# EAGLE board OSSILEDControllerNew (EAGLE 6.5.0)
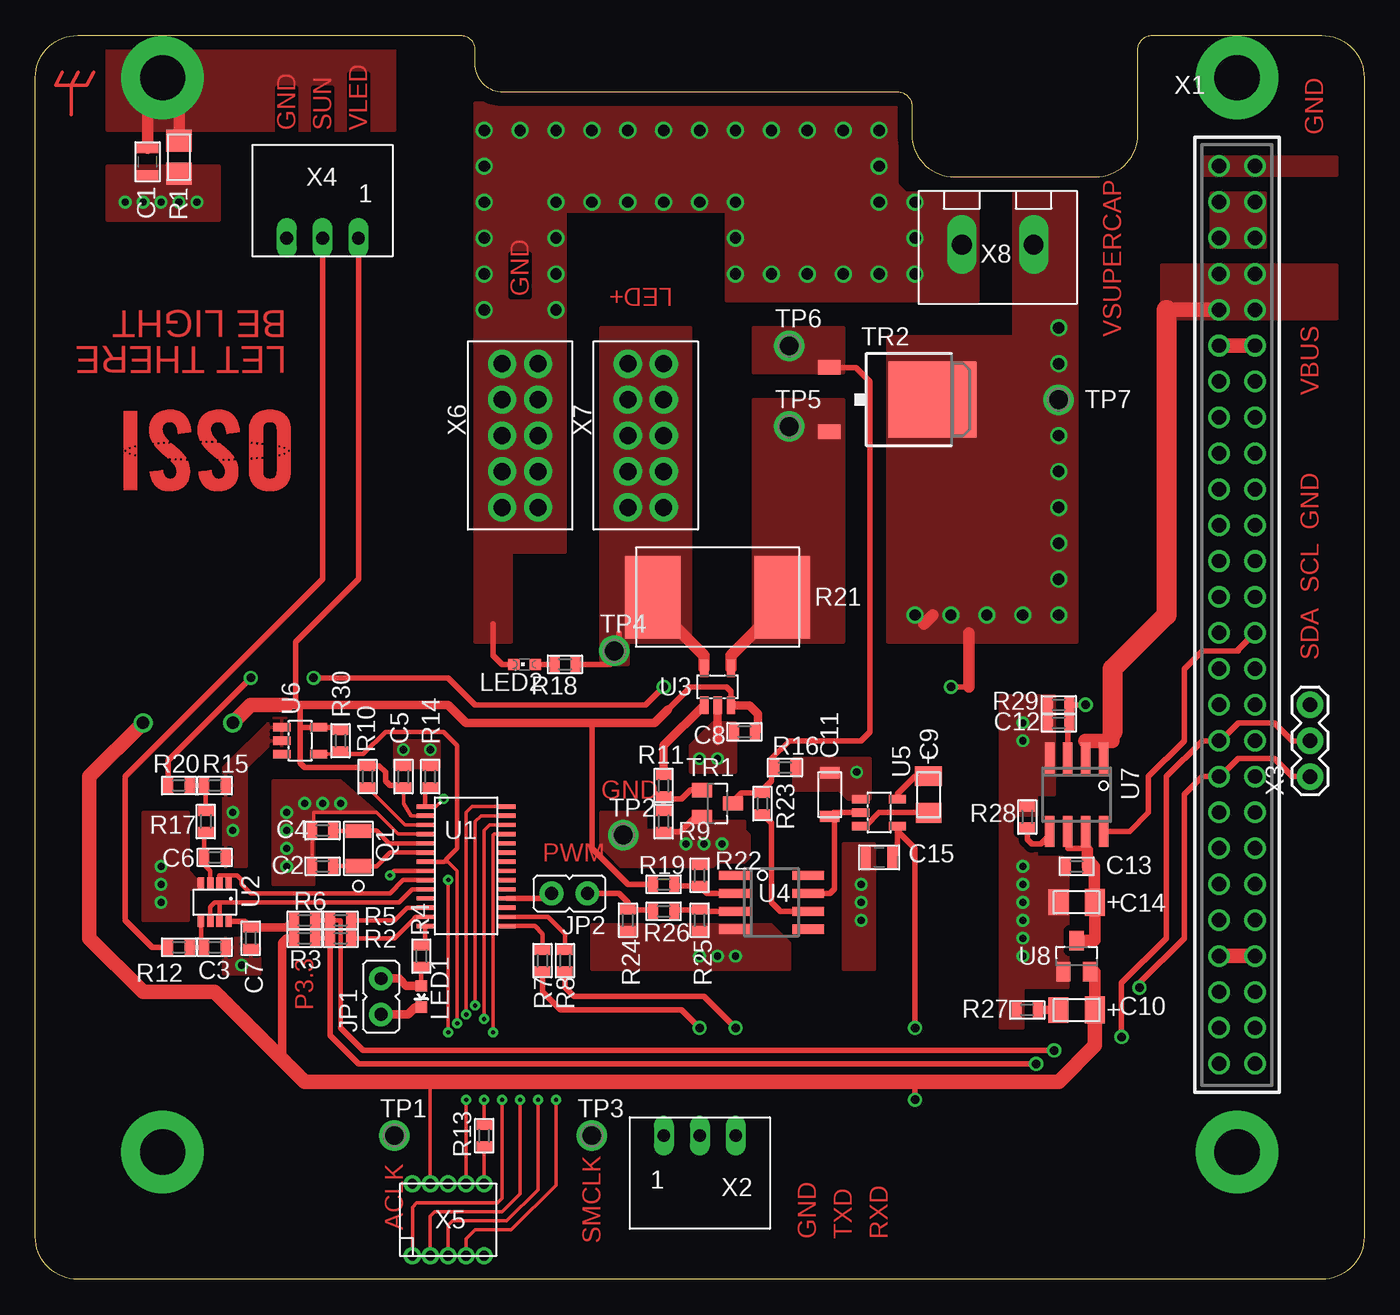
[diagram p0: board, top side]
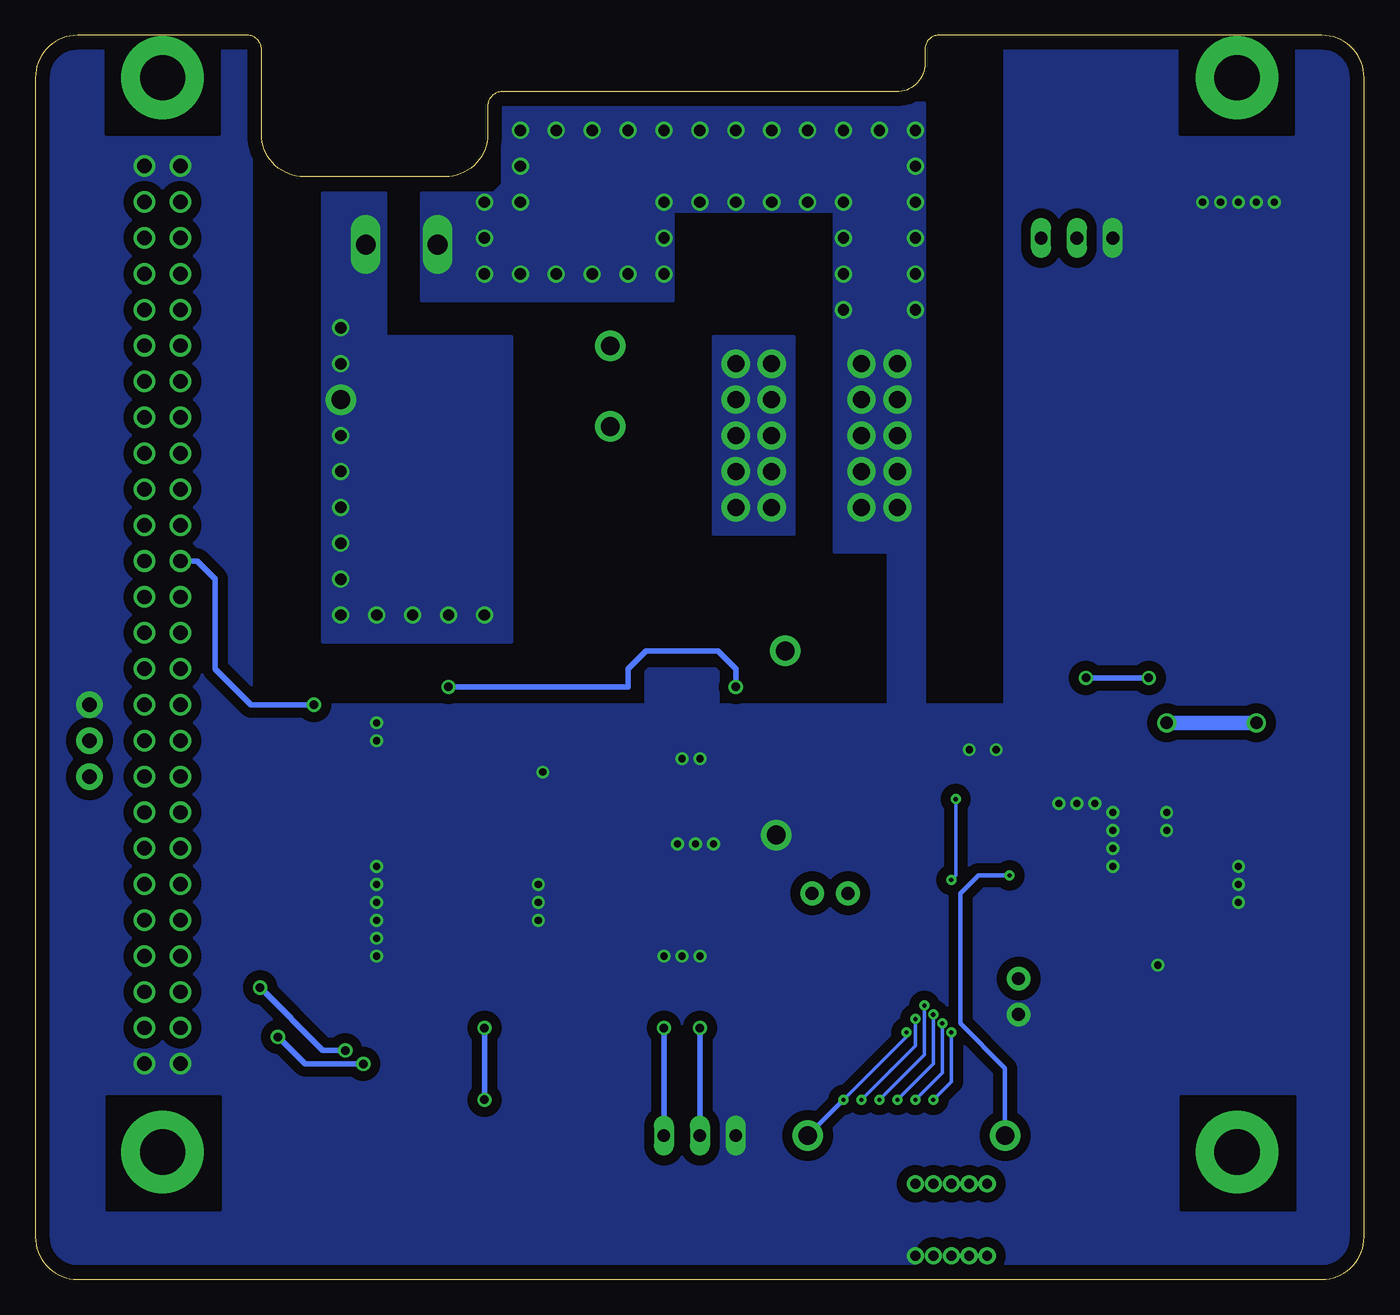
[diagram p1: board, bottom side, seen from below]

Size 94 x 88 mm. Coordinates in mm from the lower left corner, seen from the top.
Outline: 91,0 3,0 arc-90 0,3 0,85 arc-90 3,88 30.08,88 arc-90 31.08,87 31.08,86 arc90 33.08,84 44,84 44.08,84 61,84 arc-90 62,83 62,81 arc90 65,78 75,78 arc90 78,81 78,87 arc-90 79,88 91,88 arc-90 94,85 94,3 arc-90 91,0
Copper layers (1*16): Top 0.035mm / dielectric 1.5mm / Bottom 0.035mm
Design rules "default": minimum track width 10mil, minimum drill 24mil, track to track 8mil, track to pad 8mil, pad to pad 8mil, via to via 8mil, smd to smd 8mil, copper to edge 40mil, drill to drill 8mil, minimum pad ring 10mil, minimum via ring 8mil, stop-mask expansion 4mil, vias tented up to drill 0mil, thermal gap 10mil

## Footprints (pad centres in the part's own frame; a part is rotated, then mirrored left to right if it is on the bottom)
C0805(2012) = smd 0.7 x 1.5: 1 -0.95,0; 2 0.95,0
C0603(1608) = smd 0.7 x 1.1: 1 -0.75,0; 2 0.75,0
C1206(3216)-A = smd 1.4 x 1.9: 1 -1.3,0 | smd 1.4 x 1.8: 2 1.3,0
C1206-GCM31 = smd 0.8 x 1.4: P$1 -1.55,0; P$2 1.55,0
3.2-PAD-ROUND = drill 3.2 pad 5.842: B3,2 0,0
JP1 = drill 0.914 pad 1.676: 1 0,-1.27; 2 0,1.27
LED-0603 = smd 0.8 x 0.8: A 0,-0.75; C 0,0.75
CHIPLED_0603 = smd 0.8 x 0.8: A 0,-0.75; C 0,0.75
NX-3215 = smd 1 x 1.8: 1 -1.25,0; 2 1.25,0
WSL1206 = smd 1.57 x 1.78: P$1 -1.165,0; P$2 1.165,0
R0603(1608) = smd 0.7 x 1.1: 1 -0.75,0; 2 0.75,0
R4527(12070) = smd 3.94 x 5.84: P$1 -4.575,0; P$2 4.575,0
TP-13 = drill 1.321 pad 2.159: TP 0,0
SOT23 = smd 1 x 1.4: 1 -0.95,-1.1; 2 0.95,-1.1; 3 0,1.1
TO252 = smd 5.4 x 6.2: D 0,2.5 | smd 1 x 1.6: G -2.28,-4.8; S 2.28,-4.8
PW28 = smd 0.3 x 1.2: 1 -4.229,-2.908; 2 -3.579,-2.908; 3 -2.929,-2.908; 4 -2.279,-2.908; 5 -1.629,-2.908; 6 -0.979,-2.908; 7 -0.329,-2.908; 8 0.321,-2.908; 9 0.971,-2.908; 10 1.621,-2.908; 11 2.271,-2.908; 12 2.921,-2.908; 13 3.571,-2.908; 14 4.221,-2.908; 15 4.221,2.892; 16 3.571,2.892; 17 2.921,2.892; 18 2.271,2.892; 19 1.621,2.892; 20 0.971,2.892; 21 0.321,2.892; 22 -0.329,2.892; 23 -0.979,2.892; 24 -1.629,2.892; 25 -2.279,2.892; 26 -2.929,2.892; 27 -3.579,2.892; 28 -4.229,2.892
SOT23-8DCN = smd 0.45 x 0.8: 1 -0.975,-1.35; 2 -0.325,-1.35; 3 0.325,-1.35; 4 0.975,-1.35; 5 0.975,1.35; 6 0.325,1.35; 7 -0.325,1.35; 8 -0.975,1.35
SOT23-5DBV = smd 0.6 x 1.22: 1 -0.95,-1.3; 2 0,-1.3; 3 0.95,-1.3; 4 0.95,1.3; 5 -0.95,1.3
SO8 = smd 0.65 x 2.2: 1 -1.905,-2.6; 2 -0.635,-2.6; 3 0.635,-2.6; 4 1.905,-2.6; 5 1.905,2.6; 6 0.635,2.6; 7 -0.635,2.6; 8 -1.905,2.6
ESQ-126-XX-X-D = drill 1.016 pad 1.524: 1 -1.27,31.75; 2 1.27,31.75; 3 -1.27,29.21; 4 1.27,29.21; 5 -1.27,26.67; 6 1.27,26.67; 7 -1.27,24.13; 8 1.27,24.13; 9 -1.27,21.59; 10 1.27,21.59; 11 -1.27,19.05; 12 1.27,19.05; 13 -1.27,16.51; 14 1.27,16.51; 15 -1.27,13.97; 16 1.27,13.97; 17 -1.27,11.43; 18 1.27,11.43; 19 -1.27,8.89; 20 1.27,8.89; 21 -1.27,6.35; 22 1.27,6.35; 23 -1.27,3.81; 24 1.27,3.81; 25 -1.27,1.27; 26 1.27,1.27; 27 -1.27,-1.27; 28 1.27,-1.27; 29 -1.27,-3.81; 30 1.27,-3.81; 31 -1.27,-6.35; 32 1.27,-6.35; 33 -1.27,-8.89; 34 1.27,-8.89; 35 -1.27,-11.43; 36 1.27,-11.43; 37 -1.27,-13.97; 38 1.27,-13.97; 39 -1.27,-16.51; 40 1.27,-16.51; 41 -1.27,-19.05; 42 1.27,-19.05; 43 -1.27,-21.59; 44 1.27,-21.59; 45 -1.27,-24.13; 46 1.27,-24.13; 47 -1.27,-26.67; 48 1.27,-26.67; 49 -1.27,-29.21; 50 1.27,-29.21; 51 -1.27,-31.75; 52 1.27,-31.75
5268-03 = drill 0.9 long: 1 2.54,0; 2 0,0; 3 -2.54,0
1X03 = drill 1.016 pad 1.88: 1 0,0; 2 2.54,0; 3 5.08,0
M50-3200545 = drill 0.7 pad 1: 1 -2.54,-2.54; 2 -2.54,2.54; 3 -1.27,-2.54; 4 -1.27,2.54; 5 0,-2.54; 6 0,2.54; 7 1.27,-2.54; 8 1.27,2.54; 9 2.54,-2.54; 10 2.54,2.54
ICCON6643220-1 = drill 1.2 pad 2: 1 -1.27,5.08; 2 -1.27,2.54; 3 -1.27,0; 4 -1.27,-2.54; 5 -1.27,-5.08; 6 1.27,-5.08; 7 1.27,-2.54; 8 1.27,0; 9 1.27,2.54; 10 1.27,5.08
WEIDMULLER1760490000 = drill 1.4 long: 1 2.54,0; 2 -2.54,0

## Placement (x,y rotation side)
C1  DNP  [C0805(2012)]  7.94,79.06 270 top
C2  12.5pF  [C0603(1608)]  20.32,29.21 180 top
C3  100nF  [C0603(1608)]  12.7,23.5 0 top
C4  12.5pF  [C0603(1608)]  20.32,31.75 180 top
C5  100nF  [C0603(1608)]  26.04,35.56 90 top
C6  100nF  [C0603(1608)]  12.7,29.84 0 top
C7  100nF  [C0603(1608)]  15.24,24.13 270 top
C8  100nF  [C0603(1608)]  50.16,38.73 180 top
C9  10uF, LDO Tantal 16V  [C1206(3216)-A]  63.18,34.29 270 top
C10  10uF, LDO Tantal 16V  [C1206(3216)-A]  73.66,19.05 180 top
C11  4.7uF, 1206 Cap  [C1206-GCM31]  56.2,34.29 90 top
C12  1uF  [C0603(1608)]  72.39,40.64 180 top
C13  100nF  [C0603(1608)]  73.66,29.21 180 top
C14  10uF, LDO Tantal 16V  [C1206(3216)-A]  73.66,26.67 180 top
C15  1uF 0805  [C0805(2012)]  59.69,29.84 180 top
H1  MOUNT-PAD-ROUND3.2  [3.2-PAD-ROUND]  9,9 0 top
H2  MOUNT-PAD-ROUND3.2  [3.2-PAD-ROUND]  85,9 0 top
H3  MOUNT-PAD-ROUND3.2  [3.2-PAD-ROUND]  85,85 0 top
H4  MOUNT-PAD-ROUND3.2  [3.2-PAD-ROUND]  9,85 0 top
JP1  [JP1]  24.45,20 0 top
JP2  [JP1]  37.78,27.3 90 top
LED1  [LED-0603]  27.3,20 180 top
LED2  [CHIPLED_0603]  34.61,43.5 90 top
Q1  NX-3215  [NX-3215]  22.86,30.48 90 top
R1  DNP  [WSL1206]  10.16,79.38 90 top
R2  250  [R0603(1608)]  21.59,24.13 0 top
R3  10k  [R0603(1608)]  19.05,24.13 180 top
R4  1k  [R0603(1608)]  27.3,22.86 270 top
R5  250  [R0603(1608)]  21.59,25.4 0 top
R6  10k  [R0603(1608)]  19.05,25.4 180 top
R7  4.7k  [R0603(1608)]  35.88,22.54 90 top
R8  4.7k  [R0603(1608)]  37.47,22.54 90 top
R9  3k  [R0603(1608)]  44.45,32.38 270 top
R10  TBD  [R0603(1608)]  23.5,35.56 270 top
R11  5.1k  [R0603(1608)]  44.45,34.92 270 top
R12  1k  [R0603(1608)]  10.16,23.5 180 top
R13  4.7k  [R0603(1608)]  31.75,10.16 90 top
R14  47k  [R0603(1608)]  27.94,35.56 270 top
R15  100k  [R0603(1608)]  12.7,34.92 0 top
R16  DNP  [R0603(1608)]  53.02,36.2 0 top
R17  1k  [R0603(1608)]  12.06,32.38 90 top
R18  1.5k  [R0603(1608)]  37.47,43.5 180 top
R19  2.4k  [R0603(1608)]  44.45,27.94 180 top
R20  100k  [R0603(1608)]  10.16,34.92 0 top
R21  0.005, 2W RSENSE  [R4527(12070)]  48.26,48.26 180 top
R22  1.1k  [R0603(1608)]  46.99,28.57 90 top
R23  1k  [R0603(1608)]  51.44,33.66 90 top
R24  100k  [R0603(1608)]  41.91,25.4 270 top
R25  DNP  [R0603(1608)]  46.99,25.4 270 top
R26  1.5k  [R0603(1608)]  44.45,26.04 180 top
R27  0  [R0603(1608)]  70.17,19.05 180 top
R28  TBD  [R0603(1608)]  70.17,32.7 270 top
R29  100k  [R0603(1608)]  72.39,39.37 0 top
R30  100k  [R0603(1608)]  21.59,38.1 90 top
TP1  TP  [TP-13]  25.4,10.16 0 top
TP2  TP  [TP-13]  41.59,31.43 0 top
TP3  TP  [TP-13]  39.37,10.16 0 top
TP4  TP  [TP-13]  40.96,44.45 0 top
TP5  TP  [TP-13]  53.34,60.33 0 top
TP6  TP  [TP-13]  53.34,66.04 0 top
TP7  TP  [TP-13]  72.39,62.23 0 top
TR1  FDV301N  [SOT23]  48.26,33.66 270 top
TR2  FDD8896  [TO252]  60.96,62.23 270 top
U1  MSP430F2132  [PW28]  30.48,29.21 270 top
U2  OPA2347  [SOT23-8DCN]  12.7,26.67 180 top
U3  MAX4376  [SOT23-5DBV]  48.26,41.91 0 top
U4  LM7321  [SO8]  52.07,26.67 270 top
U5  MAX1682  [SOT23-5DBV]  59.69,33.02 270 top
U6  TPS3838  [SOT23-5DBV]  18.73,38.1 270 top
U7  MAX890L  [SO8]  73.66,34.29 180 top
U8  MCP1700_SOT23  [SOT23]  73.66,22.86 0 top
U$  OSSILOGORECT  [OSSILOGORECT1005]  18.05,61.5 180 top
X1  ESQ-126-38-G-D  [ESQ-126-XX-X-D]  85,47 0 top
X2  5268-03  [5268-03]  47,10.16 180 top
X3  [1X03]  90.17,35.56 90 top
X4  5268-03  [5268-03]  20.32,73.66 0 top
X5  JTAG10PINMINI-H  [M50-3200545]  29.21,4.21 0 top
X6  ICCON_POWERCON  [ICCON6643220-1]  34.29,59.69 0 top
X7  ICCON_POWERCON  [ICCON6643220-1]  43.18,59.69 0 top
X8  WEIDMULLER  [WEIDMULLER1760490000]  68.08,73.2 0 top

## Library data of the parts
C1-C15 H1-H4 JP1 JP2 Q1 R1-R30 TP1-TP7 TR1 TR2 U1-U8 U$ X1-X8 = OSSI
LED1 = SparkFun
LED2 = led

## Nets
3.3VLED: C5.1 C7.1 C8.1 C10.1 C15.1 R3.2 R6.2 R10.1 R19.2 R30.2 U1.2 U2.8 U3.3 U5.4 U6.5 U8.2 X4.1 X5.4
3.3VOBC: X1.45 X1.46
ACLK_OUT: TP1.TP U1.8
ADC1: U1.9 U2.1 U2.2
ADC2: U1.10 U2.6 U2.7
ANT_DEPLOY1: X1.19
ANT_DEPLOY2: X1.20
BAT_-CHRG: X1.42
BAT_-FAULT: X1.44
BAT_-ON: X1.38
BAT_TEMP: X1.47
BEACON_-FAULT: X1.30
BEACON_OFF: X1.24
BEACON_SCL: X1.37
BEACON_SDA: X1.39
BUS_CS: X1.27
COMMS_-FAULT: X1.32
COMMS_OFF: X1.25
COMMS_SCL: X1.41
COMMS_SDA: X1.43
GND: C1.2 C2.2 C3.2 C4.2 C5.2 C6.2 C7.2 C8.2 C11.P$2 C12.2 C13.2 C14.2 C15.2 JP1.1 LED1.C LED2.C R1.P$1 R9.2 R14.1 R15.2 R16.2 R22.2 R24.2 R25.2 R27.2 R28.1 R29.1 TP2.TP TR1.2 U1.4 U2.4 U3.2 U4.4 U5.1 U6.1 U6.2 U7.4 U8.1 X1.1 X1.2 X1.51 X1.52 X2.1 X3.3 X4.3 X5.9 X6.1 X6.2 X6.3 X6.4 X6.5 X6.6 X6.7 X6.8 X6.9 X6.10 X8.2
LED_-FAULT: U7.8 X1.28
LED_OFF: C12.1 R29.2 U7.3 X1.23
LED_SCL: R2.1 R3.1 X1.33 X3.2
LED_SDA: R5.1 R6.1 X1.35 X3.1
N$3: U1.28 X5.1
N$4: R10.2 U1.3
N$5: C13.1 C14.1 U7.6 U7.7 U8.3
N$6: R16.1 R23.2 TP6.TP TR1.3 TR2.G
N$7: C6.1 R17.1 U2.3
N$8: C3.1 R12.1 U2.5
N$9: R25.1 R26.1 U4.3
N$10: R28.2 U7.5
N$11: R15.1 R17.2 R20.2
N$12: R18.1 R21.P$2 TP4.TP U3.5 X7.1 X7.2 X7.3 X7.4 X7.5 X7.6 X7.7 X7.8 X7.9 X7.10
N$13: C11.P$1 U4.7 U5.2
N$14: R23.1 U4.6
N$15: U1.27 X5.3
N$16: R21.P$1 TP5.TP TR2.S U3.4
N$17: C10.2 R27.1
N$18: R19.1 R22.1 U4.2
N$19: C4.1 Q1.2 U1.5
N$20: C2.1 Q1.1 U1.6
N$21: JP1.2 LED1.A R4.2
N$22: R5.2 U1.12
N$23: R2.2 U1.13
N$24: R11.1 U3.1
N$25: R4.1 U1.14
N$26: C9.2 U5.3
N$27: C9.1 U5.5
N$28: R8.2 U1.16
N$29: LED2.A R18.2
N$30: R9.1 R11.2 TR1.1
N$31: U1.26 X5.5
N$32: R13.1 X5.10
N$33: JP2.2 U1.18
N$39: R7.2 U1.15
OBC_-FAULT: X1.34
OBC_OFF: X1.26
PANELTEMP_SCL: X1.29
PANELTEMP_SDA: X1.31
PWM: JP2.1 R24.1 R26.2
RESET_LED: R13.2 R30.1 U1.7 U6.4
RXD: R8.1 X2.3
SC_-ON: X1.40
SC_-PFO: X1.48
SCCHG_EN: X1.21
SCOUT_-PG: X1.50
SCOUT_EN: X1.22
SMCLK_OUT: TP3.TP U1.25 X5.7
SOLAR_-ON: X1.36
SOLAR_CS1: X1.15
SOLAR_CS2: X1.14
SOLAR_CS3: X1.17
SOLAR_CS4: X1.16
SOLAR_CS5: X1.18
STRUT_GND: C1.1 H4.B3,2 R1.P$2
SUN: R12.2 X4.2
SUPERCAP_TEMP: X1.49
TEST: R14.2 U1.1 X5.8
TXD: R7.1 X2.2
VBAT: X1.11 X1.12
VBUS: U7.1 U7.2 X1.7 X1.8 X1.9 X1.10
VSOLAR: X1.3 X1.4 X1.5 X1.6
VSUPERCAP: R20.1 TP7.TP TR2.D X8.1

## Tracks (layer width: path | path; a pad name or v marks a point on that pad's centre or on a via)
3.3VLED  (via drill 0.6, 0.9)
  Top 0.254: U1.2 26.58,32.79 26.04,33.66 C5.1 | X5.4 27.94,13.97
  Top 0.406: 18.73,39.05 18.73,40.32 18.41,40.64 18.41,45.09 22.86,49.53 X4.1 | 18.73,39.05 18.73,36.51 19.05,36.2 23.38,36.2 R10.1 24.33,36.31 24.77,35.88 24.77,35.24 25.08,34.92 26.04,34.92 C5.1 | 18.73,39.05 U6.5 21.39,39.05 R30.2 | U2.8 14.8,25.32 C7.1 | 44.77,40.32 46.35,41.91 48.9,41.91 49.21,41.59 U3.3 | C15.1 60.99,30.2 U5.4 60.99,31.72 62.23,30.48 v62.23,17.78 | v62.23,12.7 62.23,13.97 | R19.2 41.91,27.94 39.37,30.48 39.37,39.37
  Top 0.61: 17.46,15.56 17.46,23.81 17.78,24.13 R3.2 R6.2 17.78,24.88 C7.1 | U3.3 50.51,40.61 51.12,40.01 51.12,38.94 C8.1 | 17.78,40.64 18.41,40.64 29.21,40.64 30.48,39.37 39.37,39.37 43.81,39.37 44.77,40.32
  Top 0.813: U8.2 74.96,21.76 C10.1
  Top 1.016: C10.1 74.96,16.54 72.39,13.97 62.23,13.97 27.94,13.97 19.05,13.97 17.46,15.56 12.7,20.32 7.62,20.32 3.81,24.13 3.81,35.56 v7.62,39.37 | v13.97,39.37 15.24,40.64 17.78,40.64
  Bottom 0.406: v62.23,17.78 v62.23,12.7
  Bottom 1.016: v7.62,39.37 v13.97,39.37
3.3VOBC
  Top 1.016: X1.45 X1.46
ACLK_OUT  (via drill 0.3)
  Top 0.305: U1.8 25.4,28.89 v25.08,28.57
  Bottom 0.305: v25.08,28.57 27.3,28.57 27.94,27.94 28.57,27.3 28.57,18.1 25.4,14.92 TP1.TP
ADC1
  Top 0.305: U1.9 26.02,28.24 25.08,27.3 15.24,27.3 14.61,27.94 14.61,28.26 14.29,28.57 13.65,28.57 | 13.65,28.57 13.02,28.57 U2.2 | U2.1 13.68,28.55 13.65,28.57
ADC2
  Top 0.305: U1.10 26.64,27.59 25.72,26.67 15.24,26.67 13.97,26.67 13.02,26.67 | U2.6 12.38,26.03 12.38,26.04 12.38,26.35 12.7,26.67 13.02,26.67 | U2.7 13.03,26.66 13.02,26.67
GND  (via drill 0.5, 0.8)
  Top 0.254: U1.4 25.66,31.49 24.13,33.02 19.68,33.02 19.68,31.86 C4.2 C2.2
  Top 0.406: R9.2 45.6,31.64 46.35,32.38 46.67,32.7 TR1.2 | LED2.C 33.02,43.5 32.38,44.13 32.38,46.35
  Top 0.61: LED1.C 26.87,19.25 26.35,18.73 JP1.1 | U3.2 48.26,38.1
  other vias: 36.83,73.66 36.83,76.2 39.37,76.2 41.91,76.2 44.45,76.2 46.99,76.2 49.53,76.2 49.53,73.66 49.53,71.12 52.07,71.12 54.61,71.12 57.15,71.12 59.69,71.12 62.23,71.12 62.23,73.66 62.23,76.2 59.69,76.2 59.69,78.74 59.69,81.28 57.15,81.28 54.61,81.28 52.07,81.28 49.53,81.28 31.75,81.28 31.75,78.74 31.75,76.2 31.75,73.66 69.85,26.67 69.85,25.4 69.85,24.13 69.85,22.86 69.85,27.94 69.85,29.21 69.85,39.37 69.85,38.1 17.78,31.75 17.78,29.21 17.78,30.48 26.04,37.47 27.94,37.47 13.97,31.75 13.97,33.02 14.61,22.23 8.89,26.67 8.89,27.94 8.89,29.21 48.58,30.8 47.31,30.8 46.04,30.8 46.99,22.86 49.53,22.86 48.26,22.86 58.1,35.88 58.42,27.94 58.42,26.67 58.42,25.4 48.26,36.83 46.99,36.83 17.78,33.02 19.05,33.66 20.32,33.66 21.59,33.66 6.35,76.2 8.89,76.2 10.16,76.2 7.62,76.2 11.43,76.2 31.75,71.12 31.75,68.58 36.83,71.12 36.83,68.58 34.29,81.28 36.83,81.28 39.37,81.28 41.91,81.28 44.45,81.28 46.99,81.28
  pour Top (no thermals): 66.67,76.83 66.67,69.22 48.9,69.22 48.9,75.56 37.47,75.56 37.47,51.44 33.66,51.44 33.66,45.09 31.11,45.09 31.11,83.19 45.72,83.19 45.72,87.63 60.96,87.63 60.96,77.47 61.59,76.83
  pour Bottom (no thermals): 66.67,76.83 66.67,69.22 48.9,69.22 48.9,75.56 37.47,75.56 37.47,51.44 33.66,51.44 33.66,37.47 31.11,37.47 31.11,83.19 45.72,83.19 45.72,87.63 60.96,87.63 60.96,77.47 61.59,76.83
  pour Bottom (isolate 0.7, no thermals): 78.74,87.63 78.74,40.64 50.8,40.64 50.8,43.18 45.72,43.18 45.72,40.64 25.4,40.64 25.4,87.63 0,87.63 0,0 93.98,0 93.98,87.63
  pour Top (no thermals): 19.68,27.94 19.68,35.24 16.83,35.24 16.83,27.94
  pour Top (isolate 0.406, no thermals): 72.07,41.27 72.07,34.29 70.8,34.29 70.8,29.84 73.03,29.84 73.03,20.64 69.85,20.64 69.85,17.78 68.26,17.78 68.26,41.27
  pour Top (no thermals): 25.4,38.1 25.4,36.2 28.57,36.2 28.57,38.1
  pour Top: 13.34,29.21 13.34,36.2 16.83,39.69 17.78,39.69 17.78,37.78 16.51,37.78 14.92,36.2 14.92,29.21
  pour Top: 13.34,24.13 13.34,21.59 15.88,21.59 15.88,23.5 14.61,23.5 14.61,24.13
  pour Top (no thermals): 11.75,27.62 11.75,28.26 11.43,28.26 10.79,28.89 10.79,33.02 7.62,33.02 7.62,25.4 10.79,25.4 10.79,27.62
  pour Top (no thermals): 50.48,29.84 50.48,31.43 50.16,31.75 50.16,32.38 46.35,32.38 45.72,31.75 43.18,31.75 43.18,33.02 40.01,33.02 40.01,29.21 47.94,29.21 48.26,29.53 50.16,29.53
  pour Top (isolate 0.406, no thermals): 39.37,25.08 52.07,25.08 53.34,23.81 53.34,21.91 39.37,21.91
  pour Top (no thermals): 53.66,36.83 53.66,34.61 56.83,34.61 57.47,33.97 59.05,33.97 59.05,36.83
  pour Top (no thermals): 59.37,30.8 57.15,30.8 57.15,21.91 59.37,21.91
  pour Top (no thermals): 49.53,35.88 49.53,39.37 47.94,39.37 46.35,37.78 46.35,35.88
  pour Top (isolate 0.254): 19.05,35.24 21.59,35.24 24.13,33.02 19.05,33.02
  pour Top (no thermals): 5.08,78.74 5.08,74.93 13.02,74.93 13.02,78.74
  pour Top (no thermals): 82.55,79.38 92.08,79.38 92.08,78.11 82.55,78.11
LED_-FAULT
  Top 0.406: 84.99,44.45 X1.28 | U7.8 77.41,31.69 78.74,33.02 78.74,35.56 81.28,38.1 81.28,43.18 82.55,44.45 84.99,44.45 | 84.99,44.45 85.09,44.45 84.99,44.45
LED_OFF  (via drill 0.6)
  Top 0.406: U7.3 73.03,39.26 R29.2 C12.1 73.34,40.64 v74.3,40.64
  Bottom 0.406: 83.5,50.8 83.82,50.8 | X1.23 83.81,50.81 83.82,50.8 | v74.3,40.64 78.74,40.64 81.28,43.18 81.28,49.53 82.55,50.8 83.82,50.8
LED_SCL  (via drill 0.6)
  Top 0.305: R2.1 R3.1
  Top 0.406: R2.1 20.84,17.26 22.86,15.24 64.77,15.24 66.04,15.24 v70.8,15.24 | X3.2 88.9,38.1 87.63,39.37 85.09,39.37 83.82,38.1 X1.33 82.55,38.1 80.01,35.56 80.01,24.13 76.83,20.95 v76.83,17.14
  Bottom 0.406: v70.8,15.24 74.93,15.24 v76.83,17.14
LED_SDA  (via drill 0.6)
  Top 0.305: R6.1 R5.1 21.59,25.4 21.59,17.78
  Top 0.406: 21.59,17.78 22.86,16.51 23.18,16.19 64.45,16.19 66.04,16.19 v72.07,16.19 | X1.35 83.83,35.57 85.09,36.83 87.63,36.83 88.9,35.56 X3.1 | v78.11,20.64 78.11,20.95 81.28,24.13 81.28,34.29 82.55,35.56 X1.35 | X1.35 83.82,35.56 X1.35
  Bottom 0.406: v72.07,16.19 73.66,16.19 v78.11,20.64
N$1
  cutout Bottom: 81,88 81,81 89,81 89,88
N$2
  cutout Bottom: 5,88 5,81 13,81 13,88
N$3  (via drill 0.3)
  Top 0.254: U1.28 30.9,33.44 30.48,33.02 30.48,20.32 v30.48,18.73 | v33.02,12.7 33.02,7.62 33.02,5.71 32.7,5.4 26.99,5.4 26.67,5.08 X5.1 | X5.1 26.67,1.59 X5.1
  Bottom 0.254: v30.48,18.73 30.48,15.24 v33.02,12.7
N$4
  Top 0.254: U1.3 26.17,32.14 R10.2
N$5
  Top 0.254: 74.93,26.67 C14.1
  Top 0.406: U7.6 73.03,30.48 74.3,30.48 74.3,31.75 | 74.41,30.36 74.3,31.75 | 74.3,31.75 U7.7 74.3,31.75
  Top 0.813: U8.3 74.96,23.96 C14.1 | 74.41,30.36 74.41,29.73 | 74.41,29.73 74.93,29.21 74.93,26.67 | 74.41,29.73 C13.1
N$6
  Top 0.305: R16.1 52.27,36.63 52.07,36.83
  Top 0.406: TR2.G 58.05,64.51 59.05,63.5 59.05,44.77 59.05,38.73 58.42,38.1 53.34,38.1 52.07,36.83 52.07,35.24 51.75,34.92 51.44,34.61 R23.2 49.96,34.41 49.53,33.97 49.53,33.66 TR1.3
  pour Top (no thermals): 57.15,64.14 57.15,67.31 50.8,67.31 50.8,64.14
N$7
  Top 0.305: U2.3 12.38,28.9 12.06,29.21 12.06,29.73 C6.1 11.95,31.52 R17.1
N$8
  Top 0.305: R12.1 C3.1 11.72,23.72 U2.5
N$9
  Top 0.406: U4.3 47.1,26.04 R25.1 45.31,26.15 R26.1
N$10
  Top 0.406: U7.5 71.75,31.43 71.12,30.8 70.48,30.8 70.17,31.11 R28.2
N$11
  Top 0.305: R17.2 12.06,34.81 R15.1 R20.2
N$12
  Top 0.406: R18.1 40.64,43.5 41.27,44.13 41.27,45.72
  Top 0.813: U3.5 47.31,44.13 44.45,46.99
  pour Top (no thermals): 40.01,67.31 40.01,43.5 41.91,43.5 41.91,45.09 46.35,45.09 46.35,67.31
  pour Bottom (no thermals): 40.32,66.67 40.32,52.7 46.04,52.7 46.04,66.67
N$13
  Top 0.406: U5.2 56.48,33.02 C11.P$1 56.52,32.42 56.52,27.62 56.2,27.3 U4.7
N$14
  Top 0.406: U4.6 52.7,26.04 52.07,26.67 52.07,32.27 R23.1 51.55,32.79
N$15  (via drill 0.3)
  Top 0.254: U1.27 31.52,32.79 31.11,32.38 31.11,20.32 v31.11,19.37 | v34.29,12.7 34.29,6.03 33.02,4.76 28.26,4.76 27.94,4.45 X5.3
  Bottom 0.254: v31.11,19.37 31.11,15.88 v34.29,12.7
N$16
  Top 0.813: U3.4 49.21,44.13 52.07,46.99
  pour Top (no thermals): 50.8,62.23 50.8,45.09 57.15,45.09 57.15,62.23
N$17
  Top 0.61: C10.2 71.12,19.05 R27.1
N$18
  Top 0.406: U4.2 47.51,27.3 R22.1 45.31,27.82 R19.1
N$19
  Top 0.305: U1.5 25.04,30.84 24.13,31.75 22.88,31.75 Q1.2 21.09,31.73 C4.1
N$20
  Top 0.305: U1.6 25.11,30.19 24.13,29.21 22.88,29.21 Q1.1 21.09,29.23 C2.1
N$21
  Top 0.305: LED1.A R4.2
  Top 0.61: LED1.A 26.24,20.75 25.72,21.27 JP1.2
N$22
  Top 0.305: U1.12 26.29,26.29 25.4,25.4 R5.2
N$23
  Top 0.305: U1.13 26.91,25.64 26.67,25.4 25.4,24.13 R2.2
N$24
  Top 0.61: R11.1 44.45,37.75 U3.1
N$25
  Top 0.305: U1.14 27.57,23.88 R4.1
N$26
  Top 0.406: U5.3 58.74,32.07 59.69,33.02 63.15,33.02 C9.2
N$27
  Top 0.406: U5.5 60.99,34.32 62.23,35.56 63.15,35.56 C9.1
N$28
  Top 0.305: U1.16 36.27,25.64 37.47,24.45 R8.2
N$29
  Top 0.406: R18.2 LED2.A | LED2.A 36.2,43.5 LED2.A
N$30
  Top 0.406: R9.1 R11.2 44.65,33.97 45.72,33.97 46.35,34.6 TR1.1
N$31  (via drill 0.3)
  Top 0.254: U1.26 32.14,32.14 31.75,31.75 31.75,20.32 v31.75,18.41 | v35.56,12.7 35.56,6.35 33.34,4.13 29.53,4.13 29.21,3.81 X5.5
  Bottom 0.254: v31.75,18.41 31.75,16.51 v35.56,12.7
N$32
  Top 0.254: X5.10 R13.1
N$33
  Top 0.406: U1.18 36.15,26.94 JP2.2
N$39
  Top 0.305: U1.15 35.34,24.99 35.88,24.45 35.88,23.5 R7.2 | R7.2 35.88,23.18 R7.2
N$56
  cutout Bottom: 4.92,12.92 4.92,4.92 12.92,4.92 12.92,12.92
  cutout Bottom: 80.92,12.92 80.92,4.92 88.92,4.92 88.92,12.92
N$58
  Top 0.254: 2.54,82.39 2.54,84.3
N$59
  Top 0.254: 2.54,84.45 3.65,84.45 4.13,85.41 | 2.54,84.45 1.43,84.45 1.91,85.41 | 2.54,84.45 3.02,85.41
PWM
  Top 0.406: R26.2 43.59,26.15 R24.1 41.91,26.67 41.64,26.94 41.27,27.3 JP2.1
RESET_LED  (via drill 0.3)
  Top 0.254: U6.4 21.39,37.15 R30.1 | 28.9,29.54 29.2,29.54 29.84,28.89 29.84,20.32 v29.84,18.1 | v31.75,12.7 31.75,11.43 R13.2
  Top 0.305: 21.39,37.15 23.18,37.15 24.77,38.73 28.89,38.73 29.84,37.78 29.84,30.48 29.21,29.84 28.9,29.54 U1.7
  Bottom 0.254: v29.84,18.1 29.84,14.61 v31.75,12.7
RXD  (via drill 0.6)
  Top 0.406: R8.1 37.47,20.64 38.1,20 47.31,20 v49.53,17.78
  Bottom 0.406: v49.53,17.78 49.53,13.98 X2.3
SMCLK_OUT  (via drill 0.3)
  Top 0.254: U1.25 32.44,31.49 32.38,31.43 32.38,20.32 v32.38,17.46 | v36.83,12.7 36.83,6.67 33.66,3.49 31.11,3.49 30.48,2.86 X5.7
  Bottom 0.254: v32.38,17.46 32.38,17.14 v36.83,12.7
  Bottom 0.305: v36.83,12.7 TP3.TP
STRUT_GND
  Top 0.813: C1.1 7.94,83.82 | R1.P$2 10.16,84.14
  pour Top (no thermals): 5.08,81.28 5.08,87.63 25.4,87.63 25.4,81.28
SUN
  Top 0.406: R12.2 8.26,23.5 6.35,25.4 6.35,35.56 20.32,49.53 X4.2
TEST  (via drill 0.3)
  Top 0.254: U1.1 28.36,33.44 v28.89,33.97 | v29.21,28.26 29.21,20.32 29.21,18.73 v29.21,17.46 | X5.8 v30.48,12.7
  Top 0.305: U1.1 27.57,34.56 27.94,34.92 | 27.94,34.92 R14.2 | R14.2 27.94,34.92 | R14.2 27.94,34.92
  Bottom 0.254: v28.89,33.97 28.89,33.34 28.89,28.57 v29.21,28.26 | v29.21,17.46 29.21,13.97 v30.48,12.7
TXD  (via drill 0.6)
  Top 0.406: R7.1 35.88,20.32 37.15,19.05 45.72,19.05 v46.99,17.78
  Bottom 0.406: v46.99,17.78 46.99,13.97 X2.2
VBAT
  Top 1.016: X1.11 X1.12
VBUS
  Top 0.406: U7.2 74.3,37.47 74.93,38.1 | U7.1 75.56,37.47 76.2,38.1
  Top 0.61: 76.2,38.1 76.2,39.37
  Top 1.016: X1.9 80.02,68.59 80.01,68.58 | 76.2,38.1 74.93,38.1 74.3,38.1
  Top 1.422: 80.01,68.58 80.01,46.99 76.2,43.18 76.2,39.37 76.2,38.73
  pour Top (no thermals): 79.69,71.75 92.08,71.75 92.08,67.94 79.69,67.94
VSOLAR
  pour Top (no thermals): 83.82,76.83 87,76.83 87,73.03 83.19,73.03 83.19,76.83
VSUPERCAP  (via drill 0.6, 0.8)
  Top 0.406: R20.1 9.41,36.72 v15.24,42.55 | v64.77,41.91 66.04,41.91 | v19.68,42.55 29.21,42.55 31.11,40.64 43.18,40.64 v44.45,41.91
  Top 0.813: 62.87,46.35 63.5,46.99 | 66.04,41.91 66.04,45.72
  Bottom 0.406: v15.24,42.55 v19.68,42.55 | v44.45,41.91 44.45,43.18 45.72,44.45 50.8,44.45 52.07,43.18 52.07,41.91 v64.77,41.91
  other vias: 72.39,64.77 72.39,59.69 72.39,57.15 72.39,52.07 72.39,49.53 72.39,46.99 69.85,46.99 67.31,46.99 64.77,46.99 62.23,46.99 72.39,54.61 72.39,67.31
  pour Top (no thermals): 69.22,76.83 69.22,66.67 60.33,66.67 60.33,45.09 73.66,45.09 73.66,76.83
  pour Bottom (no thermals): 69.22,76.83 69.22,66.67 60.33,66.67 60.33,45.09 73.66,45.09 73.66,76.83

## Text on the board
Top: GND | SUN | VLED | GND | GND | LED+ | BE LIGHT | VSUPERCAP | LET THERE | VBUS | GND | SCL | SDA | GND | PWM | P3.3 | ACLK | SMCLK | GND | TXD | RXD
tStop: GND | SUN | VLED | GND | LED+ | BE LIGHT | VSUPERCAP | LET THERE | VBUS | GND | SCL | SDA | GND | PWM | P3.3 | ACLK | SMCLK | GND | TXD | RXD